# Altium PCB STM32F103RCT_EVK.PcbDoc (part 1 of 2)
Units mil, origin at the board's own origin, x right, y up, seen from the top; angles counter-clockwise.
Board outline 2500 x 1900 mil, 2 copper layers (Top Layer, Bottom Layer); 76 components, 81 nets, 397 pads, 87 vias.
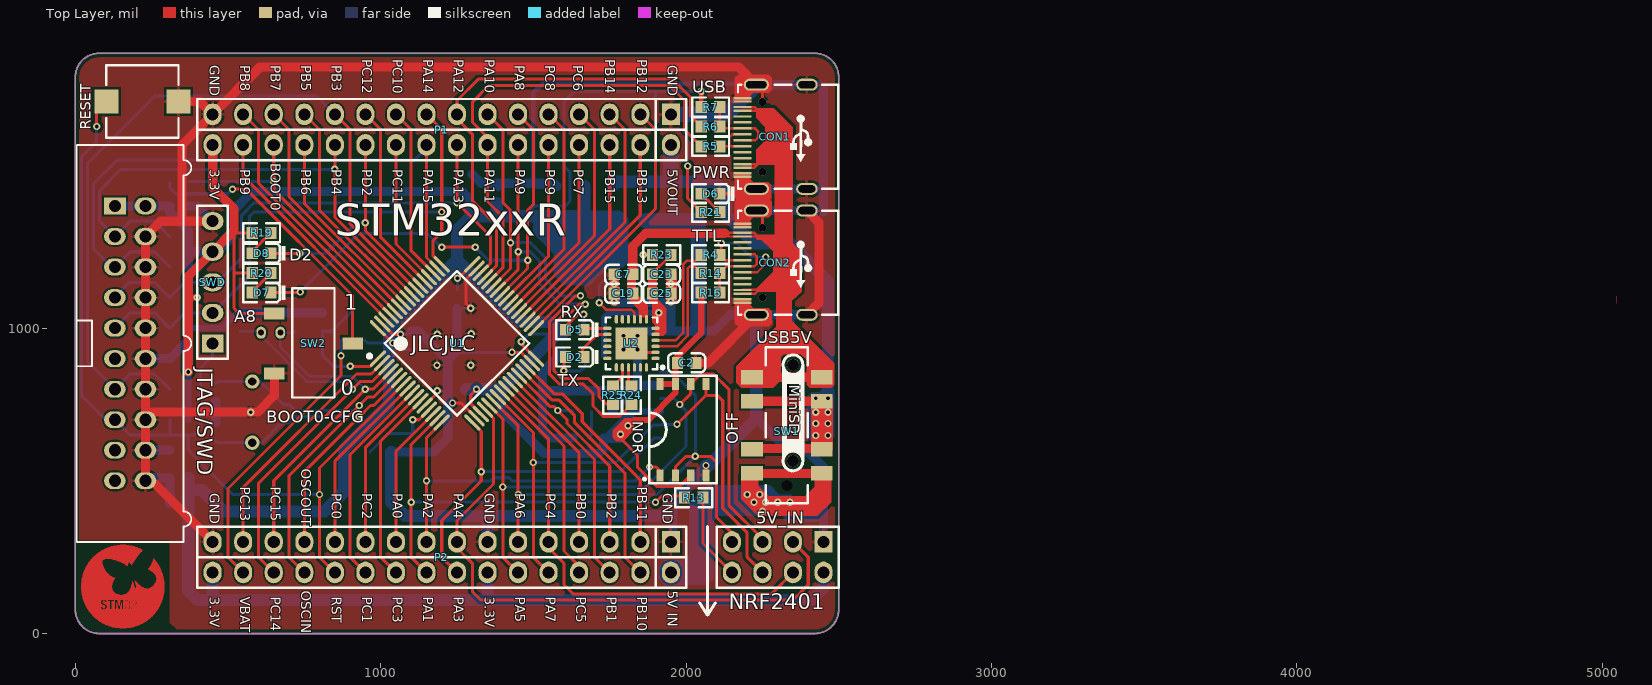
[diagram p0: Top Layer view]
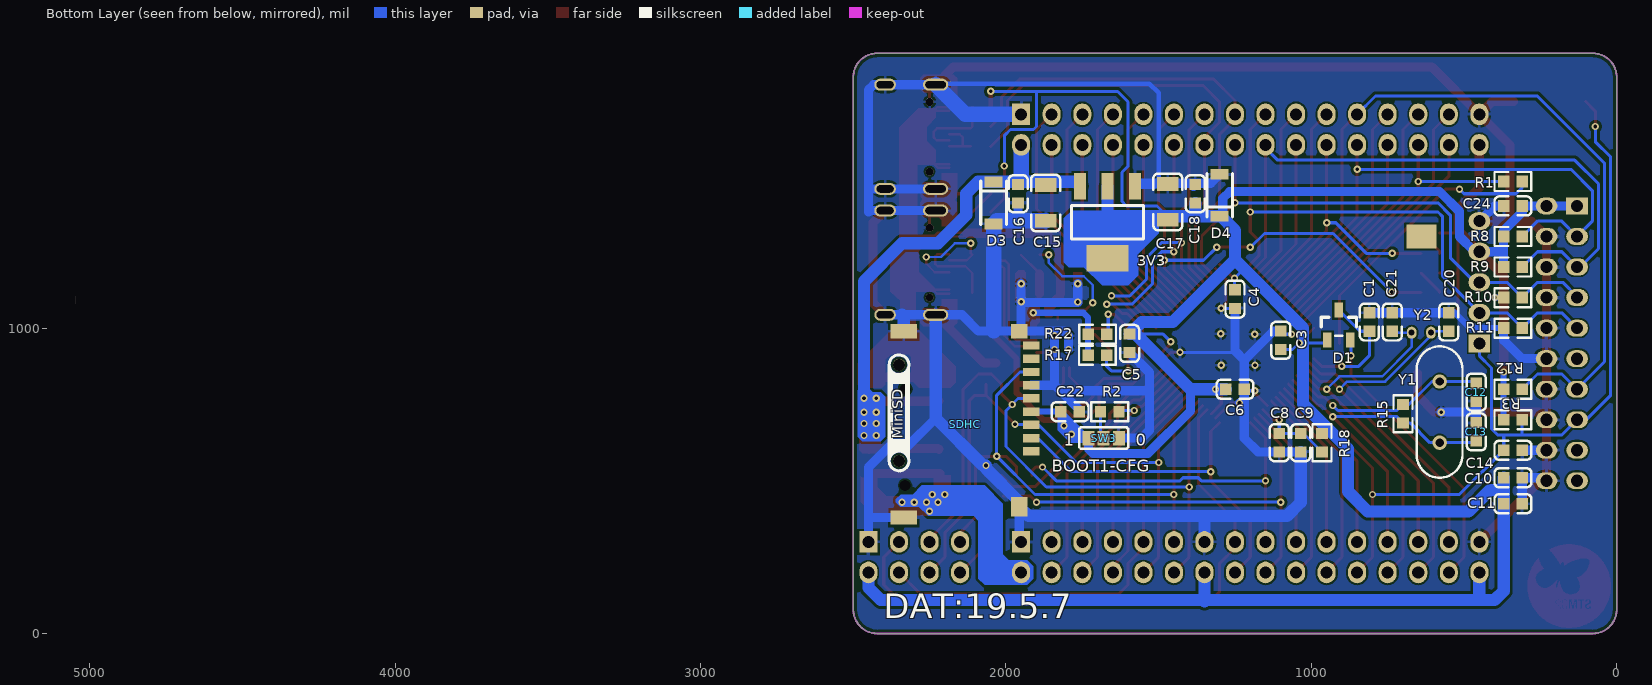
[diagram p1: Bottom Layer view, seen from below]
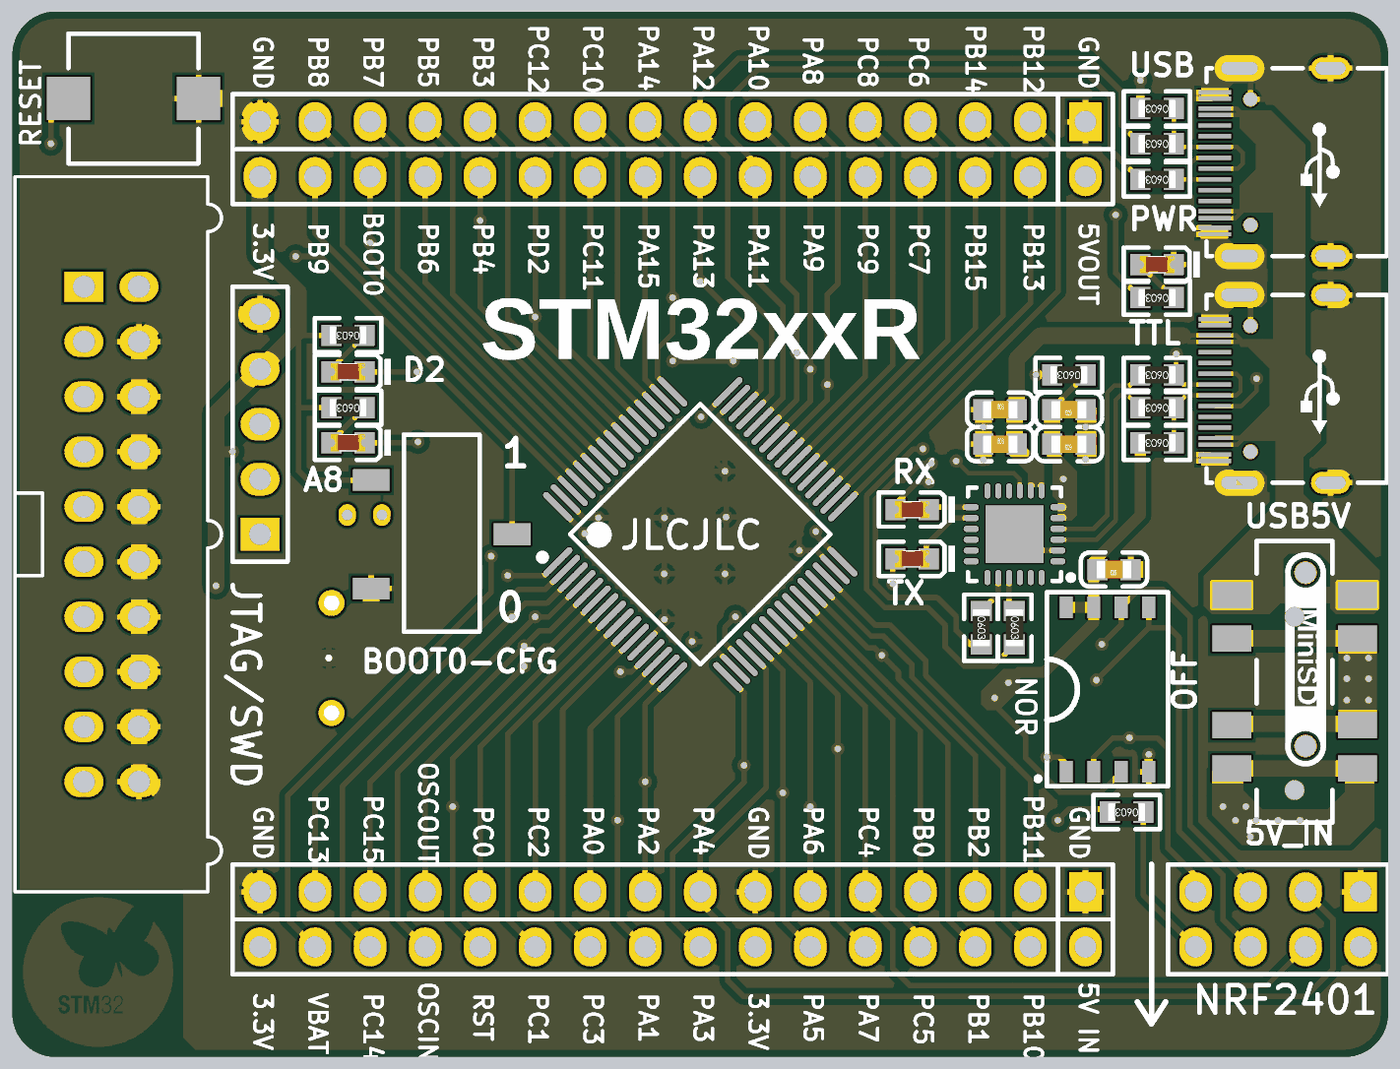
[diagram p3: 3D render of the assembled board from above, using the file's embedded part models]
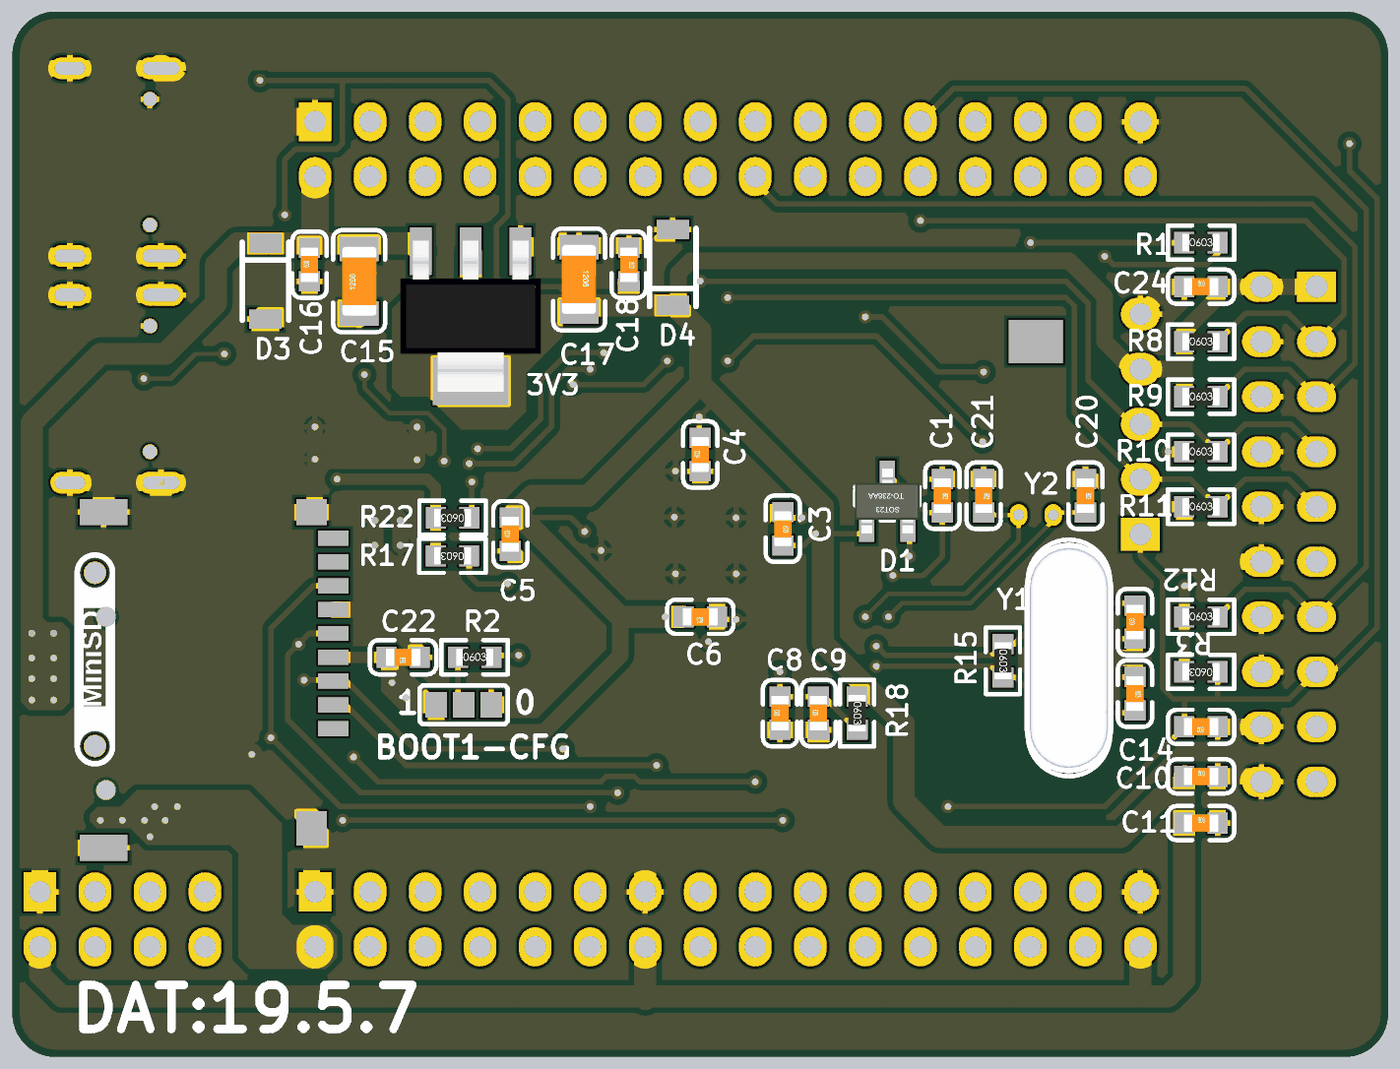
[diagram p4: 3D render of the assembled board from below, using the file's embedded part models]

## Layer stack, top to bottom
Top Solder: solder mask 0.4, Solder Resist, Dk 3.5
Top Layer: signal copper 1.4
Dielectric 1: dielectric 12.6, FR-4, Dk 4.8
Bottom Layer: signal copper 1.4
Bottom Solder: solder mask 0.4, Solder Resist, Dk 3.5

## Board outline
0,78.74 0,1821.26 cw(c78.74,1821.26) 78.74,1900 2421.26,1900 cw(c2421.26,1821.26) 2500,1821.26 2500,78.74 cw(c2421.26,78.74) 2421.26,0 78.74,0 cw(c78.74,78.74)

## Design rules (kind name [scope] priority, off if disabled: settings)
Clearance [All] p1: gap=6 ignorepadtopadclearanceinfootprint=FALSE except(8: SMDPad-Fill SMDPad-Poly SMDPad-Region; 10: Arc-Fill Arc-Poly Arc-Region Track-Fill Track-Poly Track-Region Via-Fill Via-Poly Via-Region Fill-Fill Fill-Poly Fill-Region Poly-Poly Poly-Region Region-Region)
ComponentClearance [All] p1: gap=0 collisioncheckmode=3 verticalgap=0 showdistances=FALSE
MinimumSolderMaskSliver [All] p1: minsoldermaskwidth=6
PolygonConnect [All] p1: connectstyle=Relief reliefconductorwidth=10 reliefentries=4 polygonreliefangle="90 Angle" airgapwidth=8
RoutingVias [All] p1: holewidth=15 width=30 viastyle="Through Hole" minholewidth=12 minwidth=12 maxholewidth=50 maxwidth=50
SilkToSolderMaskClearance [IsPad] p1: minsilkscreentomaskgap=6 clearancetoexposedcopper=TRUE
SolderMaskExpansion [All] p1: expansion=4
Width [All] p1: maxlimit=1000 minlimit=6 preferedwidth=10
27 further rules are at their usual default settings.

## Components (designator, comment, footprint, x,y, rotation, side; value= is the part's Value field where it differs from the comment)
3V3 "AMS1117/3.3" LC-SOT-223 1667.17,1346.38 r90 bottom
C1 "Cap" LC-0603_C 810,1020 r270 bottom value=0.1uF
C2 "Cap" LC-0603_C 2001.92,885.97 r180 top value=0.1uF
C3 "Cap" LC-0603_C 1100,960 r270 bottom value=0.1uF
C4 "Cap" LC-0603_C 1250,1095 r90 bottom value=0.1uF
C5 "Cap" LC-0603_C 1595,950 r90 bottom value=0.1uF
C6 "Cap" LC-0603_C 1250,800 r0 bottom value=0.1uF
C7 "Cap" LC-0603_C 1795,1176.25 r0 top value=4.7uF
C8 "Cap" LC-0603_C 1105,624.8 r90 bottom value=10uF
C9 "Cap" LC-0603_C 1035,624.8 r90 bottom value=0.1uF
C10 "Cap" LC-0603_C 340,510 r180 bottom value=0.1uF
C11 "Cap" LC-0603_C 340,425 r180 bottom value=10uF
C12 "Cap" LC-0603_C 460,790.31 r90 bottom value=22pF
C13 "Cap" LC-0603_C 460,660.31 r270 bottom value=22pF
C14 "Cap" LC-0603_C 340,600 r0 bottom value=0.1uF
C15 "10uF (106) 10% 50V" LC-1206_C 1870,1410 r90 bottom
C16 "Cap Semi" LC-0603_C 1960,1440 r90 bottom value=0.1uF
C17 "10uF (106) 10% 50V" LC-1206_C 1470,1413.15 r270 bottom
C18 "Cap Semi" LC-0603_C 1380,1440 r270 bottom value=0.1uF
C19 "Cap" LC-0603_C 1795,1113.8 r0 top value=0.1uF
C20 "Cap" LC-0603_C 550,1020 r270 bottom value=22pF
C21 "Cap" LC-0603_C 735,1020 r270 bottom value=22pF
C22 "Cap" LC-0603_C 1790,726.46 r0 bottom value=0.1uF
C23 "Cap" LC-0603_C 1920,1176.25 r180 top value=4.7uF
C24 "Cap" LC-0603_C 340,1400 r180 bottom value=0.1uF
C25 "Cap" LC-0603_C 1920,1113.8 r180 top value=0.1uF
CON1 "TYPEC-USB2.0" TYPEC-USB2.0 2230,1796.99 r270 top locked
CON2 "TYPEC-USB2.0" TYPEC-USB2.0 2230,1384.92 r270 top locked
D1 "BAV70 A4" LC-SOT-23(SOT-23-3) 910,1010 r270 bottom
D2 "绿灯 0603" LC-0603_LED_S1 1635,905.39 r180 top
D3 "ZMM5V6" LC-LL-34 2040,1410 r270 bottom
D4 "ZMM3V3" LC-LL-34 1300,1435 r90 bottom
D5 "红灯 0603" LC-0603_LED_S1 1635,995 r180 top
D6 "蓝灯 0603" LC-0603_LED_S1 2080,1440 r180 top
D7 "绿灯 0603" LC-0603_LED_S1 610,1116.25 r180 top
D8 "红灯 0603" LC-0603_LED_S1 610,1245 r180 top
JTAG/SWD "JTAG CON" 20Pin简牛 130,1400 r0 top locked
NOR "FLASH" M25P32_SOP8W 1990,667.63 r0 top locked
NRF2401 "NRF2401" HDR2X4 2450,300 r180 top
P1 "Header 16X2" HDR2X16 1950,1700 r180 top locked
P2 "Header 16X2" HDR2X16 1950,300 r180 top locked
R1 "Res Semi" LC-0603_R 340,1480 r180 bottom value=10K
R2 "Res Semi" LC-0603_R 1660,726.46 r180 bottom value=10K
R3 "Res Semi" LC-0603_R 340,700 r0 bottom value=10K
R4 "Res Semi" LC-0603_R 2080,1239.58 r180 top value=22R
R5 "Res Semi" LC-0603_R 2080,1594.9 r180 top value=22R
R6 "Res Semi" LC-0603_R 2080,1659.9 r180 top value=22R
R7 "Res Semi" LC-0603_R 2080,1723.84 r180 top value=1.5K
R8 "Res Semi" LC-0603_R 340,1300 r180 bottom value=10K
R9 "Res Semi" LC-0603_R 340,1200 r180 bottom value=10K
R10 "Res Semi" LC-0603_R 340,1100 r180 bottom value=10K
R11 "Res Semi" LC-0603_R 340,1000 r180 bottom value=10K
R12 "Res Semi" LC-0603_R 340,800 r180 bottom value=10K
R13 "Res Semi" LC-0603_R 2025,445 r180 top value=4.7K
R14 "Res Semi" LC-0603_R 2080,1180.07 r180 top value=22R
R15 "Res Semi" LC-0603_R 700,720 r270 bottom value=1M
R16 "Res Semi" LC-0603_R 2080,1116.25 r180 top value=1.5K
R17 "Res Semi" LC-0603_R 1700.32,910.93 r0 bottom value=5.1k
R18 "Res Semi" LC-0603_R 965,624.8 r270 bottom value=10R
R19 "Res Semi" LC-0603_R 610,1311.77 r180 top value=5.1k
R20 "Res Semi" LC-0603_R 610,1180 r180 top value=5.1k
R21 "Res Semi" LC-0603_R 2080,1380 r180 top value=5.1k
R22 "Res Semi" LC-0603_R 1700,980 r0 bottom value=5.1k
R23 "Res Semi" LC-0603_R 1920,1239.58 r180 top value=10K
R24 "Res Semi" LC-0603_R 1821.1,780 r270 top value=22R
R25 "Res Semi" LC-0603_R 1760.47,780 r270 top value=22R
RESET "RST" ALPS_SKPMA_KEY 220,1741.99 r0 top locked
SDHC "SDHC" microSD 1956.3,990.24 r180 bottom locked
SW1 "SW-P2T2" SW-P2T2 2330,681.89 r0 top locked
SW2 "SW-P1T1" SW-P1T1 780,950 r0 top locked
SW3 "SW-P1T1" SW-P1T1-JUMP 1680,640 r270 bottom
SWD "Header 5" HDR1X5 450,950 r90 top locked
U1 "STM32F103RCT6" LC-LQFP-64_10x10x05P 1250,950 r315 top locked
U2 "CP2102N-QFN24" LC-QFN-24_4x4x05P 1821.1,950 r90 top
Y1 "8Mhz" XTAL-RAD-0.2 580,725.12 r90 bottom
Y2 "32.768Khz" 32768_3*8_圆筒晶振 608.5,985.04 r0 bottom

## Footprints (in the part's own frame and the unit in brackets; to place one, negate y for a bottom-side part, rotate by r counter-clockwise, add the part's x,y. Pads: shape width x height; smd on the part's side, far side on the other; paste and mask are expansions set on the pad)
20Pin简牛 [mm]
  rect 1.8x1.4 hole 1.02: 1(0,0)
  oval 1.8x1.4 hole 1.02: 2(2.54,0) 3(0,-2.54) 4(2.54,-2.54) 5(0,-5.08) 6(2.54,-5.08) 7(0,-7.62) 8(2.54,-7.62) 9(0,-10.16) 10(2.54,-10.16) 11(0,-12.7) 12(2.54,-12.7) 13(0,-15.24) 14(2.54,-15.24) 15(0,-17.78) 16(2.54,-17.78) 17(0,-20.32) 18(2.54,-20.32) 19(0,-22.86) 20(2.54,-22.86)
  silkscreen extent -3.17,-27.94 6.35,5.08, body extent -3,-27.71 5.9,4.79, height 8.5
32768_3*8_圆筒晶振 [mm]
  oval 0.8x1 hole 0.5: 1(0,0) 2(1.6,0)
  rect 2.5x2 smd: 3(0.8,-8)
ALPS_SKPMA_KEY [mm]
  rect 2x2 smd: 1(-3,0) 2(3,0)
  silkscreen extent -3,-3 3,3
HDR1X5 [mm] "Connector; Header; 5 Position"
  rect 1.5x1.8 hole 1: 1(0,0)
  oval 1.5x1.8 hole 1: 2(2.54,0) 3(5.08,0) 4(7.62,0) 5(10.16,0)
  silkscreen extent -1.27,-1.27 11.43,1.27
HDR2X4 [mm] "Connector; Header; 4x2 Position"
  rect 1.5x1.8 hole 1: 1(0,0)
  oval 1.5x1.8 hole 1: 2(0,2.54) 3(2.54,0) 4(2.54,2.54) 5(5.08,0) 6(5.08,2.54) 7(7.62,0) 8(7.62,2.54)
  silkscreen extent -1.27,-1.27 8.89,3.81
HDR2X16 [mm] "Connector; Header; 16x2 Position"
  rect 1.5x1.8 hole 1: 1(0,0)
  oval 1.5x1.8 hole 1: 2(0,2.54) 3(2.54,0) 4(2.54,2.54) 5(5.08,0) 6(5.08,2.54) 7(7.62,0) 8(7.62,2.54) 9(10.16,0) 10(10.16,2.54) 11(12.7,0) 12(12.7,2.54) 13(15.24,0) 14(15.24,2.54) 15(17.78,0) 16(17.78,2.54) 17(20.32,0) 18(20.32,2.54) 19(22.86,0) 20(22.86,2.54) 21(25.4,0) 22(25.4,2.54) 23(27.94,0) 24(27.94,2.54) 25(30.48,0) 26(30.48,2.54) 27(33.02,0) 28(33.02,2.54) 29(35.56,0) 30(35.56,2.54) 31(38.1,0) 32(38.1,2.54)
  silkscreen extent -1.27,-1.27 39.37,3.81
LC-0603_C [mm]
  rect 0.93x0.98 smd: 1(-0.77,0) 2(0.77,0)
  silkscreen extent -1.53,-0.79 1.54,0.79, body extent -0.8,-0.4 0.8,0.4, height 0.3
LC-0603_LED_S1 [mm]
  rect 0.93x0.98 smd: A(0.77,0) K(-0.77,0)
  silkscreen extent -1.98,-0.79 1.54,0.79, body extent -0.8,-0.4 0.8,0.4, height 0.6
LC-0603_R [mm]
  rect 0.93x0.98 smd: 1(-0.77,0) 2(0.77,0)
  silkscreen extent -1.53,-0.79 1.54,0.79, body extent -0.85,-0.4 0.85,0.4, height 0.56
LC-1206_C [mm]
  rect 1.13x1.8 smd: 1(-1.49,0) 2(1.49,0)
  silkscreen extent -2.36,-1.2 2.35,1.2, body extent -1.6,-0.81 1.6,0.79, height 1
LC-LL-34 [mm]
  rect 0.9x1.5 smd: 1(1.75,0) 2(-1.75,0)
  silkscreen extent -1.8,-1.08 1.8,1.08
LC-LQFP-64_10x10x05P [mm]
  oval 0.28x1.8 smd mask+0.051: 1(-3.75,-5.55) 2(-3.25,-5.55) 3(-2.75,-5.55) 4(-2.25,-5.55) 5(-1.75,-5.55) 6(-1.25,-5.55) 7(-0.75,-5.55) 8(-0.25,-5.55) 9(0.25,-5.55) 10(0.75,-5.55) 11(1.25,-5.55) 12(1.75,-5.55) 13(2.25,-5.55) 14(2.75,-5.55) 15(3.25,-5.55) 16(3.75,-5.55) 33(3.75,5.55) 34(3.25,5.55) 35(2.75,5.55) 36(2.25,5.55) 37(1.75,5.55) 38(1.25,5.55) 39(0.75,5.55) 40(0.25,5.55) 41(-0.25,5.55) 42(-0.75,5.55) 43(-1.25,5.55) 44(-1.75,5.55) 45(-2.25,5.55) 46(-2.75,5.55) 47(-3.25,5.55) 48(-3.75,5.55)
  oval 1.8x0.28 smd mask+0.051: 17(5.55,-3.75) 18(5.55,-3.25) 19(5.55,-2.75) 20(5.55,-2.25) 21(5.55,-1.75) 22(5.55,-1.25) 23(5.55,-0.75) 24(5.55,-0.25) 25(5.55,0.25) 26(5.55,0.75) 27(5.55,1.25) 28(5.55,1.75) 29(5.55,2.25) 30(5.55,2.75) 31(5.55,3.25) 32(5.55,3.75) 49(-5.55,3.75) 50(-5.55,3.25) 51(-5.55,2.75) 52(-5.55,2.25) 53(-5.55,1.75) 54(-5.55,1.25) 55(-5.55,0.75) 56(-5.55,0.25) 57(-5.55,-0.25) 58(-5.55,-0.75) 59(-5.55,-1.25) 60(-5.55,-1.75) 61(-5.55,-2.25) 62(-5.55,-2.75) 63(-5.55,-3.25) 64(-5.55,-3.75)
  silkscreen extent -4.55,-6.05 4.25,4.25
LC-QFN-24_4x4x05P [mm]
  rect 2.68x2.68 smd mask+0.051: 0(0,0)
  oval 0.28x0.7 smd mask+0.051: 1(-1.25,-2) 2(-0.75,-2) 3(-0.25,-2) 4(0.25,-2) 5(0.75,-2) 6(1.25,-2) 13(1.25,2) 14(0.75,2) 15(0.25,2) 16(-0.25,2) 17(-0.75,2) 18(-1.25,2)
  oval 0.7x0.28 smd mask+0.051: 7(2,-1.25) 8(2,-0.75) 9(2,-0.25) 10(2,0.25) 11(2,0.75) 12(2,1.25) 19(-2,1.25) 20(-2,0.75) 21(-2,0.25) 22(-2,-0.25) 23(-2,-0.75) 24(-2,-1.25)
  silkscreen extent -2.15,-2.73 2.15,2.15
LC-SOT-23(SOT-23-3) [mm]
  rect 1.25x0.7 smd: 1(1.25,-0.95) 2(1.25,0.95) 3(-1.25,0)
  silkscreen extent -0.65,-1.46 0.9,1.46, body extent -1.5,-1.5 1.5,1.5, height 1.3
LC-SOT-223 [mm]
  rect 2.2x1 smd: 1(3,-2.3) 2(3,0) 3(3,2.3)
  rect 2.2x3.5 smd: 2(-3,0)
  silkscreen extent -1.4,-3 1.4,3, body extent -3.49,-3.24 3.49,3.24, height 1.64
M25P32_SOP8W [mm]
  rect 0.6x1 smd: 1(-1.905,-3.8) 2(-0.635,-3.8) 3(0.635,-3.8) 4(1.905,-3.8) 5(1.905,3.8) 6(0.635,3.8) 7(-0.635,3.8) 8(-1.905,3.8)
  silkscreen extent -3.28,-4.47 2.79,4.5, body extent -2.66,-3.95 2.64,4.05, height 2.02
microSD [mm]
  round 1 hole 1: 0(-10,-10.8) 0(-10,-2.8)
  rect 1.4x0.7 smd: 1(1,-10) 2(1,-8.9) 3(1,-7.8) 4(1,-6.7) 5(1,-5.6) 6(1,-4.5) 7(1,-3.4) 8(1,-2.3) 9(1,-1.2)
  rect 1.4x1.6 smd: G1(0,-14.6)
  rect 2.2x1.2 smd: G2(-9.6,-15.5) G3(-9.6,0)
  rect 1.4x1.2 smd: G4(0,0)
  silkscreen extent -10.95,-11.62 -9.07,-1.98, body extent -13.97,-15.85 1.48,0.46, height 1.97
SW-P1T1 [mm]
  rect 1.7x1 smd: 1(-3.25,2.5) 2(3.25,0) 3(-3.25,-2.5)
  silkscreen extent -1.75,-4.5 1.75,4.6
SW-P1T1-JUMP [mm]
  rect 1.2x1 smd: 1(0,1.27) 2(0,0) 3(0,-1.27)
  silkscreen extent -0.89,-2.03 0.89,2.03
SW-P2T2 [mm]
  round 0.5 hole 0.9: 0(0,-5) 0(0,3)
  rect 1.8x1.2 smd: 1(-2.9,4) 2(-2.9,2) 3(-2.9,-2) 4(-2.9,-4) 5(2.9,-4) 6(2.9,-2) 7(2.9,2) 8(2.9,4)
  silkscreen extent -1.75,-6.5 1.75,6.5
TYPEC-USB2.0 [mm]
  rect 0.2x1.5 smd: A1(7.666,-1.143) A4(6.919,-1.143) A5(5.627,-1.143) A6(4.632,-1.143) A7(4.134,-1.143) A8(6.124,-1.143) A9(1.858,-1.143) A12(1.111,-1.143) B1(1.397,-1.143) B4(2.159,-1.143) B5(2.641,-1.143) B6(3.637,-1.143) B7(5.129,-1.143) B8(3.139,-1.143) B9(6.604,-1.143) B12(7.366,-1.143)
  round 0.65 hole 0.65: B1(1.43,0.508) B2(7.237,0.508)
  oval 1x1.8 hole 0.6 slot 1.4 at 90 deg: D0(0,4.204) D0(8.667,4.204)
  oval 1x2.1 hole 0.6 slot 1.7 at 90 deg: D0(0,0) D0(8.667,0)
  silkscreen extent 0,-1.52 8.67,6.8
XTAL-RAD-0.2 [mm] "Radial Cap, Thru-Hole; 2 Leads; 0.2 in Pin Spacing"
  round 1.2 hole 0.7: 1(-2.54,0) 2(2.54,0)
  silkscreen extent -5.46,-1.91 5.46,1.91, body extent -5.33,-2.05 5.33,2.05, height 3.22

## Part data
3V3: library part AMS1117
C1 C2 C3 C4 C5 C6 C7 C8 C9 C10 C11 C12 C13 C14 C19 C20 C21 C22 C23 C24 C25: "Capacitor", LatestRevisionDate=17-Jul-2002, LatestRevisionNote="Re-released for DXP Platform.", PackageDescription="Radial Cap, Thru-Hole; 2 Leads; 0.3 in Pin Spacing", PackageReference=RAD-0.3, Published=8-Jun-2000, Publisher="Altium Limited"
C15 C17: library part "1206 10uF (106) 10% 50V", "贴片电容", Package=1206, SuppliersPartNumber=C13585, ComponentLink1Description=供?, ComponentLink1URL=http://www.szlcsc.com/product/details_14236.html, Supplier=LC
C16 C18: "Capacitor (Semiconductor SIM Model)", LatestRevisionDate=29-May-2009, LatestRevisionNote="IPC-7351 Footprint Added.", PackageDescription="Chip Capacitor", PackageReference=C1206, Published=8-Jun-2000, Publisher="Altium Limited"
D1: library part "SOT-23 BAV70 A4", "开关二极管", Package=SOT-23, SuppliersPartNumber=C68978, ComponentLink1Description=供?, ComponentLink1URL=http://www.szlcsc.com/product/details_70091.html, Supplier=LC
D2 D7: library part "0603 绿灯", "发光二极管", Package=0603, SuppliersPartNumber=C72043, ComponentLink1Description=供?, ComponentLink1URL=http://www.szlcsc.com/product/details_73152.html, Supplier=LC
D3: library part "LL-34 ZMM5V6", "稳压二极管", Package=LL-34, SuppliersPartNumber=C8062, ComponentLink1Description=供?, ComponentLink1URL=http://www.szlcsc.com/product/details_8541.html, Supplier=LC
D4: library part "LL-34 ZMM3V3", "稳压二极管", Package=LL-34, SuppliersPartNumber=C8056, ComponentLink1Description=供?, ComponentLink1URL=http://www.szlcsc.com/product/details_8535.html, Supplier=LC
D5 D8: library part "0603 红灯", "发光二极管", Package=0603, SuppliersPartNumber=C2286, ComponentLink1Description=供?, ComponentLink1URL=http://www.szlcsc.com/product/details_2659.html, Supplier=LC
D6: library part "0603 蓝灯", "发光二极管", Package=0603, SuppliersPartNumber=C72041, ComponentLink1Description=供?, ComponentLink1URL=http://www.szlcsc.com/product/details_73150.html, Supplier=LC
JTAG/SWD: library part JTAG
P1 P2: "Header, 16-Pin, Dual row", LatestRevisionDate=17-Jul-2002, LatestRevisionNote="Re-released for DXP Platform.", Publisher="Altium Limited"
R1 R2 R3 R4 R5 R6 R7 R8 R9 R10 R11 R12 R13 R14 R15 R16 R17 R18 R19 R20 R21 R22 R23 R24 R25: "Semiconductor Resistor", LatestRevisionDate=17-Jul-2002, LatestRevisionNote="Re-released for DXP Platform.", PackageDescription="Axial Device, Thru-Hole; 2 Leads; 0.5 in Pin Spacing", PackageReference=AXIAL-0.5, Published=8-Jun-2000, Publisher="Altium Limited"
RESET: library part SW-PB, "Switch", LatestRevisionDate=17-Jul-2002, LatestRevisionNote="Re-released for DXP Platform.", PackageDescription="Switch; 2 Leads", PackageReference=SPST-2, Published=24-Mar-1999, Publisher="Altium Limited"
SWD: "Header, 5-Pin", LatestRevisionDate=17-Jul-2002, LatestRevisionNote="Re-released for DXP Platform.", Publisher="Altium Limited"
U1: library part STM32F103RET6, "ARM Cortex-M3 32-bit MCU, 512 KB Flash, 64 KB Internal RAM, 51 I/Os, 64-pin LQFP, -40 to 85 degC, Tray", I/Os (High Current)=51, Operating Frequency(F) (Processor speed) (MHz)=72, Supplier Part Number 1=497-6444-ND, Supply Voltage(Vcc) min (V)=2, A/D Converter="3x12-bit (16 Channel)", ComponentLink1Description="Manufacturer URL", ComponentLink1URL=http://www.st.com/web/en/home.html, ComponentLink2Description=Datasheet, ComponentLink2URL=http://www.st.com/st-web-ui/static/active/en/resource/technical/document/datasheet/CD00191185.pdf, ComponentLink3Description="Package Specification", ComponentLink3URL=http://www.st.com/st-web-ui/static/active/en/resource/technical/document/datasheet/DM00037051.pdf, Core="ARM Cortex-M3", D/A Converter="2x12-bit (2 Channel)", DatasheetVersion="Rev. 8", FLASH Size (Prog) (kB)=512, Internal RAM Size (kB)=64, Mounting Technology="Surface Mount", PackageDescription="64-Pin Low Profile Quad Flat Package, 10 x 10 mm Body, 0.5 mm Pitch", PackageReference=LQFP64, PackageVersion="Rev. 4, 06/2013", Packing=Tray, PartNumber=STM32F103RET6, Supplier 1=Digi-Key, Supplier 2=Farnell, Supplier 3=Newark, Supplier 4=Newark, Supplier 5=Mouser, Supplier Part Number 2=1624138, Supplier Part Number 3=01P4101, Supplier Part Number 4=57P1231, Supplier Part Number 5=511-STM32F103RET6
Y1 Y2: library part XTAL, "Crystal Oscillator", LatestRevisionDate=17-Jul-2002, LatestRevisionNote="Re-released for DXP Platform.", PackageDescription="Crystal, Thru-Hole; 2 Leads; Body 3.1 x 8.2 mm (Dia.xH)", PackageReference=R38, Published=8-Jun-2000, Publisher="Altium Limited"

## Via types
v1: diameter 24, hole 12, Top Layer to Bottom Layer, tented both sides, 87 vias

## Nets (pads, with @x,y where several pads share a name; then routed paths per layer and width w, separated by ;. In a path a pad name is that pad's centre, name@x,y a point inside that pad or via, vN(x,y) a via of type N, cw(c..) or ccw(c..) an arc to the next point about the centre after c; other vN are vias at no path point)
3V3: 3V3.2 C2.2 C3.2 C4.2 C5.2 C6.2 C10.1 C11.1 C17.2 C18.2 C22.2 C24.2 D1.1 D4.2 JTAG/SWD.1 JTAG/SWD.2 NOR.3 NOR.7 NOR.8 NRF2401.2 P1.32 P2.14 P2.32 R3.2 R7.2 R8.1 R9.1 R10.1 R12.1 R16.2 R18.1 R19.2 R20.2 R21.2 SDHC.4 SW2.1 SW3.3 SWD.4 U1.19 U1.32 U1.48 U1.64 | length 12906.5
  Top Layer w10: SWD.4@450,1250 SWD.4@480,1250 ; R20.2@579.69,1180 520,1180 519.71,1180.29 ; R19.2@579.69,1311.77 527.64,1311.77 519.71,1319.71 519.71,1180.29 ; SW2.1@652.05,1048.43 536.58,1048.43 519.71,1065.29 519.71,1180.29 ; U1.64@991.1,1000.11 v1(1040,951.21) ; v1(1251.61,1163.39) 1254.6,1163.39 U1.48@1300.11,1208.9 ; v1(1314.03,800) 1295,780.97 1295,751.89 U1.19@1327.95,718.94 ; v1(1460,955) 1460,948.79 U1.32@1508.9,899.89 ; v1(1785,652.76) 1785,638.92 1841.1,582.82 1841.1,544.41 1904.57,480.94 1977.92,480.94 NOR.3@2015,518.02 ; v1(2005,1530.52) 2005,1424.68 R21.2@2049.69,1380
  Top Layer w15: R7.2@2049.69,1723.84 2049.69,1774.68 v1(2050,1775)
  Top Layer w20: 370,1100 v1(400,1100) ; v1(1810.06,680) 1828.99,698.93 1875.4,698.93 1965,788.53 NOR.7@1965,817.23 ; NOR.8@1915,817.23 NOR.7@1965,817.23 ; R16.2@2049.69,1116.25 2049.69,984.68 1965,900 NOR.7@1965,817.23
  Top Layer w30: v1(370,856.38) 370,1100 370,1170 SWD.4@450,1250 519.71,1319.71 519.71,1390.29 450,1460 P1.32@450,1600
  Bottom Layer w10: D1.1@947.4,960.79 956.98,951.21 1027,951.21 ; v1@1032,951.21 v1(1040,951.21) 1061.52,929.69 C3.2@1100,929.69 ; 1216.26,1190 1225,1190 v1(1251.61,1163.39) 1251.61,1126.92 C4.2@1250,1125.32 ; v1(1460,955) 1485.32,980.31 1575.63,980.31 ; C17.2@1471.18,1366.1 1505.08,1400 1605,1400 1620,1415 1620,1510 1600,1530 1600,1740.69 1634.31,1775 1900,1775 ; v1(2005,1530.52) 2005,1630 1985,1650 1910,1650 1900,1660 1900,1775 ; v1(2050,1775) 1900,1775
  Bottom Layer w20: v1(370,856.38) 370.32,856.06 R3.2@370.32,700 ; R10.1@370.32,1100 v1(400,1100) ; SW3.3@1730,640 1733.86,640 C22.2@1820.32,726.46 SDHC.4@1916.93,726.46
  Bottom Layer w30: JTAG/SWD.1@130,1400 JTAG/SWD.2@230,1400 C24.2@309.69,1400 309.69,1380.32 370.32,1319.69 R8.1@370.32,1300 370.32,1250 ; R9.1@370.32,1200 370.32,1250 ; v1@1032,951.21 1032,1000.74 ; D4.2@1300,1366.1 1289.84,1376.26 1289.84,1424.84 1267.69,1447 580,1447 515,1382 515,1300 465,1250 SWD.4@450,1250 370.32,1250 ; 1395.32,800 1395.32,729.69 1535,590 1715.22,590 1730,604.78 SW3.3@1730,640
  Bottom Layer w40: C10.1@370.32,510 370.32,470 ; 450,115 P2.32@450,200 ; C6.2@1280.32,800 v1(1314.03,800) 1395.32,800 1575.63,980.31 C5.2@1595,980.31 1555.32,1020 1453.74,1020 1250,1223.74 ; 1350,105 1350,110 ; P2.14@1350,200 1350,110 ; C18.2@1380,1409.68 1380,1366.1 ; 3V3.2@1667.17,1228.27 1667.17,1350 ; 3V3.2@1667.17,1464.49 1667.17,1350 ; NRF2401.2@2450,200 2450,150 2410,110 1350,110 ; 370.32,470 415,470 485,400 815,400 880,465 880,605 1027,752 1027,951.21 1027,1000.74 1216.26,1190 1250,1223.74 ; 370.32,470 C11.1@370.32,425 370.32,139.69 400,110 1350,110 ; 1250,1223.74 1250,1320 1296.1,1366.1 D4.2@1300,1366.1 1380,1366.1 ; 1380,1366.1 1471.18,1366.1 1651.06,1366.1 1667.17,1350
5V_IN: P2.2 SW1.4 SW1.5 | length 679.4
  Top Layer w30: SW1.4@2215.83,524.41 SW1.5@2444.17,524.41 SW1.5@2444.17,524.41
  Bottom Layer w40: P2.2@1950,200 2020,200 2050,230 2050,392.86 2112.14,455 v1(2200,455)
  other v1: 2250,400 2222.51,430 2260,430 2300,430 2340,430 2241.49,455
5V_USB: C7.2 C19.2 CON1.A4 CON1.A9 CON1.B4 CON1.B9 CON2.A4 CON2.A9 CON2.B4 CON2.B9 SW1.1 SW1.8 U2.7 U2.8 | length 1241
  Top Layer w8: 2126.82,1310.86 2133.84,1303.84 2141.77,1311.77 CON2.A9@2185,1311.77 2223.86,1311.77 2235.71,1299.92 CON2.B4@2185,1299.92 2137.76,1299.92 ; CON2.A4@2185,1112.53 2225.89,1112.53 2237.06,1123.7 2235.85,1124.92 CON2.B9@2185,1124.92 ; CON1.A4@2185,1524.6 2222.69,1524.6 2235.08,1536.99 CON1.B9@2185,1536.99 ; CON1.B4@2185,1711.99 2235.77,1711.99 2223.92,1723.84 CON1.A9@2185,1723.84
  Top Layer w30: C19.2@1821.1,1113.8 C7.2@1821.1,1176.25 ; C7.2@1825.32,1176.25 1825.32,1268.17 1868,1310.86 2126.82,1310.86 ; SW1.1@2220,839.44 2220.12,839.31 2448.35,839.31 SW1.8@2448.35,839.44
+5V: 3V3.3 C15.2 C16.2 D3.2 P1.2 SW1.2 SW1.3 SW1.6 SW1.7 | length 1909.4
  Top Layer w30: SW1.3@2220,603.22 2222.51,605.72 2448.35,605.72 SW1.6@2448.35,603.22 ; SW1.2@2220,760.7 SW1.7@2448.35,760.7
  Bottom Layer w40: 3V3.3@1757.72,1464.49 1772.13,1478.9 C16.2@1951.42,1478.9 ; C16.2@1950,1480.32 C16.2@1951.42,1478.9 ; v1@2420,733.12 2464.65,777.78 2464.65,1153.02 2339.82,1277.86 2222.14,1277.86 2130,1370 2130,1440.32 2091.42,1478.9 D3.2@2040,1478.9 C16.2@1951.42,1478.9
  Bottom Layer w50: C16.2@1950,1480.32 P1.2@1950,1600
  other v1: 2425,648.51 2464.65,648.51 2425,687.44 2464.65,687.44 2425,725 2464.65,725 2425,770 2464.65,770
BOOT0: P1.28 R1.1 U1.60 | length 988.2
  Top Layer w10: P1.28@650,1600 v1(650,1480) 650,1452.56 U1.60@1046.78,1055.79
  Bottom Layer w10: R1.1@370.32,1480 v1(650,1480)
BOOT1: P2.5 R2.2 U1.28 | length 725.7
  Top Layer w10: U1.28@1453.22,844.21 1553.72,743.72 1566.28,743.72 v1(1580,730) 1610,700 1610,687.44 1750,547.44 P2.5@1750,300
  Bottom Layer w10: v1(1580,730) 1626.14,730 R2.2@1629.69,726.46
CP2102_DM: R4.2 U2.4 | length 396.5
  Top Layer w8: U2.4@1899.84,959.84 1965,959.84 1990,984.84 1990,1208.08 2001.92,1220 2030.1,1220 R4.2@2049.69,1239.58
CP2102_DP: R14.2 U2.3 | length 396.6
  Top Layer w8: U2.3@1899.84,940.16 1970.16,940.16 2005,975 2005,1194.76 2012.82,1202.57 2027.19,1202.57 R14.2@2049.69,1180.07
F_CS: NOR.1 P2.17 U1.16 | length 1223.1
  Top Layer w10: P2.17@1150,300 v1(1150,500) 1150,641.21 U1.16@1199.89,691.1 ; v1(1880,545) 1902.11,545 1915,532.11 NOR.1@1915,518.02
  Bottom Layer w10: v1(1150,500) 1360,500 1370,510 1420,510 1430,500 1835,500 v1(1880,545)
GND: 3V3.1 C1.1 C2.1 C3.1 C4.1 C5.1 C6.1 C7.1 C8.1 C9.1 C10.2 C11.2 C12.1 C13.1 C14.1 C15.1 C16.1 C17.1 C18.1 C19.1 C20.1 C21.1 C22.1 C23.1 C24.1 C25.1 CON1.A1 CON1.A12 CON1.B1 CON1.B12 CON1.D0 CON2.A1 CON2.A12 CON2.B1 CON2.B12 CON2.D0 D3.1 D4.1 D6.K JTAG/SWD.4 JTAG/SWD.6 JTAG/SWD.8 JTAG/SWD.10 JTAG/SWD.12 JTAG/SWD.14 JTAG/SWD.16 JTAG/SWD.18 JTAG/SWD.20 NOR.4 NRF2401.1 P1.1 P1.31 P2.1 P2.13 P2.31 R11.1 RESET.2 SDHC.6 SDHC.G1 SDHC.G2 SDHC.G3 SDHC.G4 SW2.3 SW3.1 SWD.5 U1.12 U1.18 U1.31 U1.47 U1.63 U2.0 U2.2 | length 16252.2
  Top Layer w10: U1.63@1005.02,1014.03 1039.05,980 v1(1065,980) ; U1.12@1144.21,746.78 1185,787.56 v1(1185,795) ; v1(1235,755) 1264.05,755 U1.18@1314.03,705.02 ; v1(1295,1064.71) 1280,1079.71 1280,1160.95 U1.47@1314.03,1194.98 ; v1(1430,920.47) 1460.48,920.47 U1.31@1494.98,885.97 ; v1(1841.1,930) 1850.63,920.47 U2.2@1899.84,920.47 ; D6.K@2110.32,1440 2185.34,1440 ; CON2.D0@2230,1384.92 2250,1364.92 CON2.B1@2250,1328.62 ; CON1.D0@2230,1796.99 2250,1776.99 CON1.B1@2250,1740.69
  Top Layer w15: NOR.4@2065,518.02 v1(2065,550)
  Top Layer w30: RESET.2@338.11,1741.99 408.02,1741.99 P1.31@450,1700 ; P2.31@450,300 250,500 JTAG/SWD.20@230,500 JTAG/SWD.18@230,600 JTAG/SWD.16@230,700 ; SWD.5@450,1350 350,1350 ; SW2.3@652.05,851.57 652.05,779.9 597.14,725 v1(575,725) 255,725 JTAG/SWD.16@230,700 ; C2.1@2032.24,885.97 2072.27,885.97 CON2.D0@2230,1043.7 ; CON1.D0@2230,1796.99 2171.99,1855 605,1855 P1.31@450,1700 ; CON2.D0@2395.51,1043.7 2435,1083.19 2435,1345.43 CON2.D0@2395.51,1384.92 ; JTAG/SWD.16@230,700 JTAG/SWD.14@230,800 JTAG/SWD.12@230,900 JTAG/SWD.10@230,1000 JTAG/SWD.8@230,1100 JTAG/SWD.6@230,1200 JTAG/SWD.4@230,1300 280,1350 350,1350 ; 350,1350 350,1600 P1.31@450,1700
  Bottom Layer w10: v1(1065,980) 1089.69,980 C3.1@1100,990.31 ; v1(1185,795) 1214.69,795 C6.1@1219.69,800 ; 1250,925.63 1255.16,920.47 v1(1430,920.47) ; C4.1@1250,1064.68 v1(1295,1064.71)
  Bottom Layer w15: C17.1@1500,1484.49 1500,1770 1530.5,1800.5 2226.49,1800.5 CON1.D0@2230,1796.99
  Bottom Layer w20: R11.1@370.32,1000 480,1000 530.32,1050.32 C20.1@540,1050.32 ; C17.1@1500,1484.49 1510,1474.49
  Bottom Layer w30: JTAG/SWD.20@230,500 240,510 C10.2@309.69,510 C11.2@309.69,425 ; JTAG/SWD.18@230,600 C14.1@309.69,600 ; JTAG/SWD.12@230,900 310,900 370.32,960.31 R11.1@370.32,1000 ; C24.1@370.32,1400 400,1400 SWD.5@450,1350 ; C13.1@460,690.63 460,725.31 ; C12.1@460,760 460,725.31 ; C20.1@540,1050.32 C20.1@550,1050.32 C21.1@735,1050.32 C1.1@810,1050.32 ; v1(575,725) 574.69,725.31 460,725.31 ; C9.1@1035,594.49 C8.1@1105,594.49 1174.17,594.49 1219.69,640 1219.69,755 ; C3.1@1100,990.31 1124.69,990.31 1219.69,895.31 ; v1(1235,755) 1219.69,755 ; C4.1@1250,1064.68 1250,925.63 1219.69,895.31 ; D4.1@1300,1503.9 1329.41,1474.49 1510,1474.49 1566.61,1474.49 3V3.1@1570.79,1470.32 ; C18.1@1380,1470.32 C18.1@1385.83,1464.49 ; 1514.17,1470.32 3V3.1@1570.79,1470.32 ; 3V3.1@1576.61,1464.49 3V3.1@1570.79,1470.32 ; C5.1@1595,919.69 1530,854.69 1530,795 ; SW3.1@1630,640 1555,640 1530,665 1530,795 ; C22.1@1759.69,726.46 1759.69,733.12 1820,793.44 ; v1(1764.69,1145.03) v1(1764.69,1085.44) 1764.69,1083.5 1764.87,1083.32 1947.25,1083.32 v1(1950.32,1086.38) ; v1(1795,929.84) v1(1795,975) 1810.24,990.24 SDHC.G4@1956.3,990.24 ; v1(1841.1,975) v1(1841.1,930) 1841.1,814.54 1839.63,813.07 ; SDHC.6@1916.93,813.07 1839.63,813.07 ; P2.1@1950,300 1956.3,306.3 SDHC.G1@1956.3,415.43 ; 1950,1351.34 1960,1361.34 C16.1@1960,1409.68 ; v1(1950.32,1145.03) v1(1950.32,1086.38) ; 2230,705 2322.47,612.53 2381.96,612.53 2450,544.49 2450,380 ; CON2.D0@2230,1384.92 CON2.D0@2395.51,1384.92 2445.08,1384.92 2450,1380 2450,1460 ; CON1.D0@2230,1455.76 CON1.D0@2395.51,1455.76 2445.77,1455.76 2450,1460 ; CON1.D0@2230,1796.99 CON1.D0@2395.51,1796.99 2433.02,1796.99 2450,1780 2450,1460 ; SDHC.G2@2334.25,380 2450,380 ; CON2.D0@2395.51,1043.7 2340,1043.7 CON2.D0@2230,1043.7 2143.7,1043.7 2090.24,990.24 2040,990.24 SDHC.G4@1956.3,990.24 ; NRF2401.1@2450,300 2450,380 ; 1219.69,755 C6.1@1219.69,800 1219.69,895.31 ; 1530,795 1821.56,795 1839.63,813.07 ; v1(1950.32,1086.38) 1950.32,996.22 SDHC.G4@1956.3,990.24
  Bottom Layer w40: C9.1@1035,594.49 1035,430 1080,385 1350,385 ; P2.13@1350,300 1350,385 ; CON2.D0@2230,1043.7 2230,705 2075,550 v1(2065,550) 2065,540 1956.3,431.3 SDHC.G1@1956.3,415.43 1925.87,385 1350,385 ; SDHC.G3@2334.25,990.24 2334.25,1037.95 2340,1043.7
  Bottom Layer w50: C15.1@1870,1351.34 1950,1351.34 2029.76,1351.34 D3.1@2040,1341.1 2040,990.24 ; P1.1@1950,1700 2133.02,1700 CON1.D0@2230,1796.99
  other v1: 1184.61,878.1 1295,878.1 1185,980 1297.05,981.1
JTCK: JTAG/SWD.9 P1.17 R11.2 SWD.2 U1.49 | length 1918.2
  Top Layer w10: P1.17@1150,1700 1200,1650 v1(1200,1380) 1200,1315 1172.05,1287.05 1172.05,1236.74 U1.49@1199.89,1208.9
  Bottom Layer w10: JTAG/SWD.9@130,1000 180,1050 259.69,1050 R11.2@309.69,1000 309.69,1000.31 359.37,1050 SWD.2@450,1050 570,1170 570,1365 585,1380 v1(1200,1380)
JTDI: JTAG/SWD.5 P1.18 R9.2 U1.50 | length 2096.9
  Top Layer w10: P1.18@1150,1600 1150,1230.95 U1.50@1185.97,1194.98
  Bottom Layer w10: R9.2@309.69,1200 259.69,1250 180,1250 JTAG/SWD.5@130,1200 120,1200 60,1260 60,1472.3 137.7,1550 1110,1550 1150,1590 P1.18@1150,1600
JTDO: JTAG/SWD.13 P1.23 R12.2 U1.55 | length 2609.3
  Top Layer w10: P1.23@850,1700 900,1650 900,1341.76 U1.55@1116.37,1125.38
  Bottom Layer w10: R12.2@309.69,800 259.69,850 180,850 JTAG/SWD.13@130,800 40,890 40,1540 260,1760 790,1760 P1.23@850,1700
JTMS: JTAG/SWD.7 P1.16 R10.2 SWD.3 U1.46 | length 1851.5
  Top Layer w10: P1.16@1250,1600 v1(1250,1410) 1360,1300 1360,1213.11 U1.46@1327.95,1181.06
  Bottom Layer w10: JTAG/SWD.7@130,1100 130,1103.22 176.78,1150 259.69,1150 R10.2@309.69,1100 359.69,1150 SWD.3@450,1150 465,1150 545,1230 545,1370 585,1410 v1(1250,1410)
JTRST: JTAG/SWD.3 P1.24 R8.2 U1.56 | length 1785
  Top Layer w10: P1.24@850,1600 v1(850,1520) 850,1363.92 U1.56@1102.45,1111.47
  Bottom Layer w10: R8.2@309.69,1300 258.35,1351.34 181.34,1351.34 JTAG/SWD.3@130,1300 80,1350 80,1450 150,1520 v1(850,1520)
LED0: D7.K P1.11 U1.41 | length 1610.7
  Top Layer w10: D7.K@640.32,1116.25 736.88,1116.25 v1(736.88,1118.12) ; v1(1200,1265) v1(1310,1265) ; U1.41@1397.55,1111.47 1481.06,1194.98 v1(1481.06,1222.16) 1481.06,1386.06 1500,1405 1500,1650 P1.11@1450,1700
  Bottom Layer w10: v1(736.88,1118.12) 928.77,1310 1153.64,1310 1199.32,1264.32 v1(1200,1265) ; v1(1310,1265) 1352.84,1222.16 v1(1481.06,1222.16)
LED1: D8.K P1.22 U1.54 | length 886.5
  Top Layer w10: D8.K@640.32,1245 v1(735,1245) ; P1.22@950,1600 v1(950,1345) 950,1319.6 U1.54@1130.29,1139.3
  Bottom Layer w10: v1(735,1245) 820,1245 920,1345 v1(950,1345)
NetC1_2: C1.2 D1.3 U1.1 | length 414.4
  Top Layer w10: v1(900,875) 966.21,875 U1.1@991.1,899.89
  Bottom Layer w10: v1(900,875) 845,875 810,910 C1.2@810,989.69 840.47,989.69 D1.3@910,1059.21
NetC8_2: C8.2 C9.2 R18.2 U1.13 | length 276.7
  Top Layer w10: v1(1105,700) 1125.28,700 U1.13@1158.13,732.86
  Bottom Layer w10: R18.2@965,594.49 1025.63,655.12 C9.2@1035,655.12 C8.2@1105,655.12 v1(1105,700)
NetCON1_A6: CON1.A6 CON1.B6 R6.1 R7.1 | length 270.5
  Top Layer w8: R7.1@2110.32,1723.84 R6.1@2110.32,1659.9 2116.4,1653.81 CON1.B6@2185,1653.81 2225.77,1653.81 2235.77,1643.82 2235.77,1624 2226.41,1614.64 CON1.A6@2185,1614.64
NetCON1_A7: CON1.A7 CON1.B7 R5.1 | length 145.1
  Top Layer w8: R5.1@2115.13,1595.05 2141,1595.05 2141,1624 2151.23,1634.23 CON1.A7@2185,1634.23 ; 2143,1595.05 CON1.B7@2185,1595.05
NetCON2_A6: CON2.A6 CON2.B6 R14.1 R16.1 | length 271.6
  Top Layer w8: R16.1@2110.32,1116.25 R14.1@2110.32,1180.07 2132.82,1202.57 CON2.A6@2185,1202.57 2224.02,1202.57 2231.81,1210.37 2231.81,1234.18 2224.24,1241.75 CON2.B6@2185,1241.75
NetCON2_A7: CON2.A7 CON2.B7 R4.1 | length 396.3
  Top Layer w8: v1(2115,1277.86) 2115,1244.27 R4.1@2110.32,1239.58 2127.74,1222.16 CON2.A7@2185,1222.16 ; CON2.B7@2185,1182.98 2232.98,1182.98 2261.04,1211.04 v1(2261.04,1232.85)
  Bottom Layer w8: v1(2115,1277.86) 2167.14,1277.86 2212.15,1232.85 v1(2261.04,1232.85)
NetD2_A: D2.A R17.1 | length 153.1
  Top Layer w10: D2.A@1599.69,900.79 1599.69,860.32 v1(1600,860)
  Bottom Layer w10: v1(1600,860) 1655,860 1670,875 R17.1@1670,910.93
NetD2_K: D2.K U2.14 | length 131.7
  Top Layer w10: D2.K@1660.32,900.79 1660.32,929.84 1710,979.53 U2.14@1742.36,979.53
NetD5_A: D5.A R22.1 | length 151.2
  Top Layer w10: D5.A@1599.69,999.32 1645.36,1045 v1(1665,1045)
  Bottom Layer w10: v1(1665,1045) 1665,984.69 R22.1@1669.69,980
NetD5_K: D5.K U2.13 | length 82.1
  Top Layer w10: D5.K@1660.32,999.32 1660.43,999.21 U2.13@1742.36,999.21
NetD6_A: D6.A R21.1 | length 85.5
  Top Layer w10: D6.A@2049.69,1440 2109.69,1380 R21.1@2110.32,1380
NetD7_A: D7.A R20.1 | length 88.9
  Top Layer w10: D7.A@579.69,1116.25 579.69,1119.37 R20.1@640.32,1180
NetD8_A: D8.A R19.1 | length 91.9
  Top Layer w10: D8.A@579.69,1245 579.69,1251.14 R19.1@640.32,1311.77
NetNRF2401_8: NRF2401.8 R13.1 | length 284.2
  Top Layer w10: R13.1@2055.32,445 2055.32,294.69 NRF2401.8@2150,200
NetR1_2: R1.2 SW2.2 | length 930.4
  Top Layer w10: v1(515,1455) 560,1455 907.95,1107.05 SW2.2@907.95,950
  Bottom Layer w10: R1.2@309.69,1476.44 309.69,1460 329.69,1440 500,1440 v1(515,1455)
NetR2_1: R2.1 SW3.2 | length 90.7
  Bottom Layer w10: SW3.2@1680,640 1690.32,650.31 R2.1@1690.32,726.46
NetR23_2: R23.2 U2.9 | length 438.5
  Top Layer w8: v1(1715.22,1083.13) 1737.56,1060.79 1820.32,1060.79 1830.95,1050.16 U2.9@1830.95,1028.74 ; v1(1860.16,1240) 1860.58,1239.58 R23.2@1889.69,1239.58
  Bottom Layer w8: v1(1715.22,1083.13) 1715.22,1140.24 1744.97,1170 1754.3,1170 ; 1754.33,1170.03 1775.04,1170.03 ; 1775.07,1170 1815,1170 1860.16,1215.16 v1(1860.16,1240)
NetR24_1: R24.1 U2.21 | length 65
  Top Layer w10: U2.21@1811.26,871.26 1811.26,820.16 R24.1@1821.1,810.31
NetR25_1: R25.1 U2.20 | length 73.8
  Top Layer w10: R25.1@1760.47,810.31 1791.58,841.42 U2.20@1791.58,871.26
NRF_CE: NRF2401.3 P2.15 U1.20 | length 1969.7
  Top Layer w10: U1.20@1341.87,732.86 1369.71,705.02 1369.71,489.71 1250,370 P2.15@1250,300 1250,280.11 1300.11,230 1300.11,137.84 1327.95,110 2350,110 2400,160 2400,250 NRF2401.3@2350,300
NRF_CS: NRF2401.4 P2.9 U1.24 | length 1503.8
  Top Layer w10: U1.24@1397.55,788.53 1550,636.08 P2.9@1550,300 1550,280 1600,230 1600,160 1630,130 2280,130 NRF2401.4@2350,200
NRF_IRQ: P2.18 R13.2 U1.15 | length 1487.3
  Top Layer w10: P2.18@1150,200 1100,250 v1(1100,430) 1100,619.05 U1.15@1185.97,705.02 ; v1(1899.84,430) 1920.16,450.32 R13.2@1989.37,450.32 ; R13.2@1994.69,445 R13.2@1989.37,450.32 ; R13.2@2010,450.32 R13.2@1989.37,450.32
  Bottom Layer w10: v1(1100,430) v1(1899.84,430)
OSCIN: C12.2 P2.26 R15.1 U1.5 Y1.2 | length 1338.1
  Top Layer w10: P2.26@750,200 700,250 700,516.78 v1(930,746.78) 957.84,774.62 977.18,774.62 U1.5@1046.78,844.21
  Bottom Layer w10: C12.2@460,820.63 464.49,825.12 Y1.2@580,825.12 605.2,825.12 680,750.31 R15.1@700,750.31 720.32,730 913.22,730 v1(930,746.78)